# Altium PCB 主板-20190829.PcbDoc (part 3 of 6)
Units mm, origin at the board's own origin, x right, y up, seen from the top; angles counter-clockwise.
Board outline 97.69 x 103.45 mm, 2 copper layers (Top Layer, Bottom Layer); 77 components, 70 nets, 247 pads, 251 vias.
Unrouted connection lines stored in the file: 4.
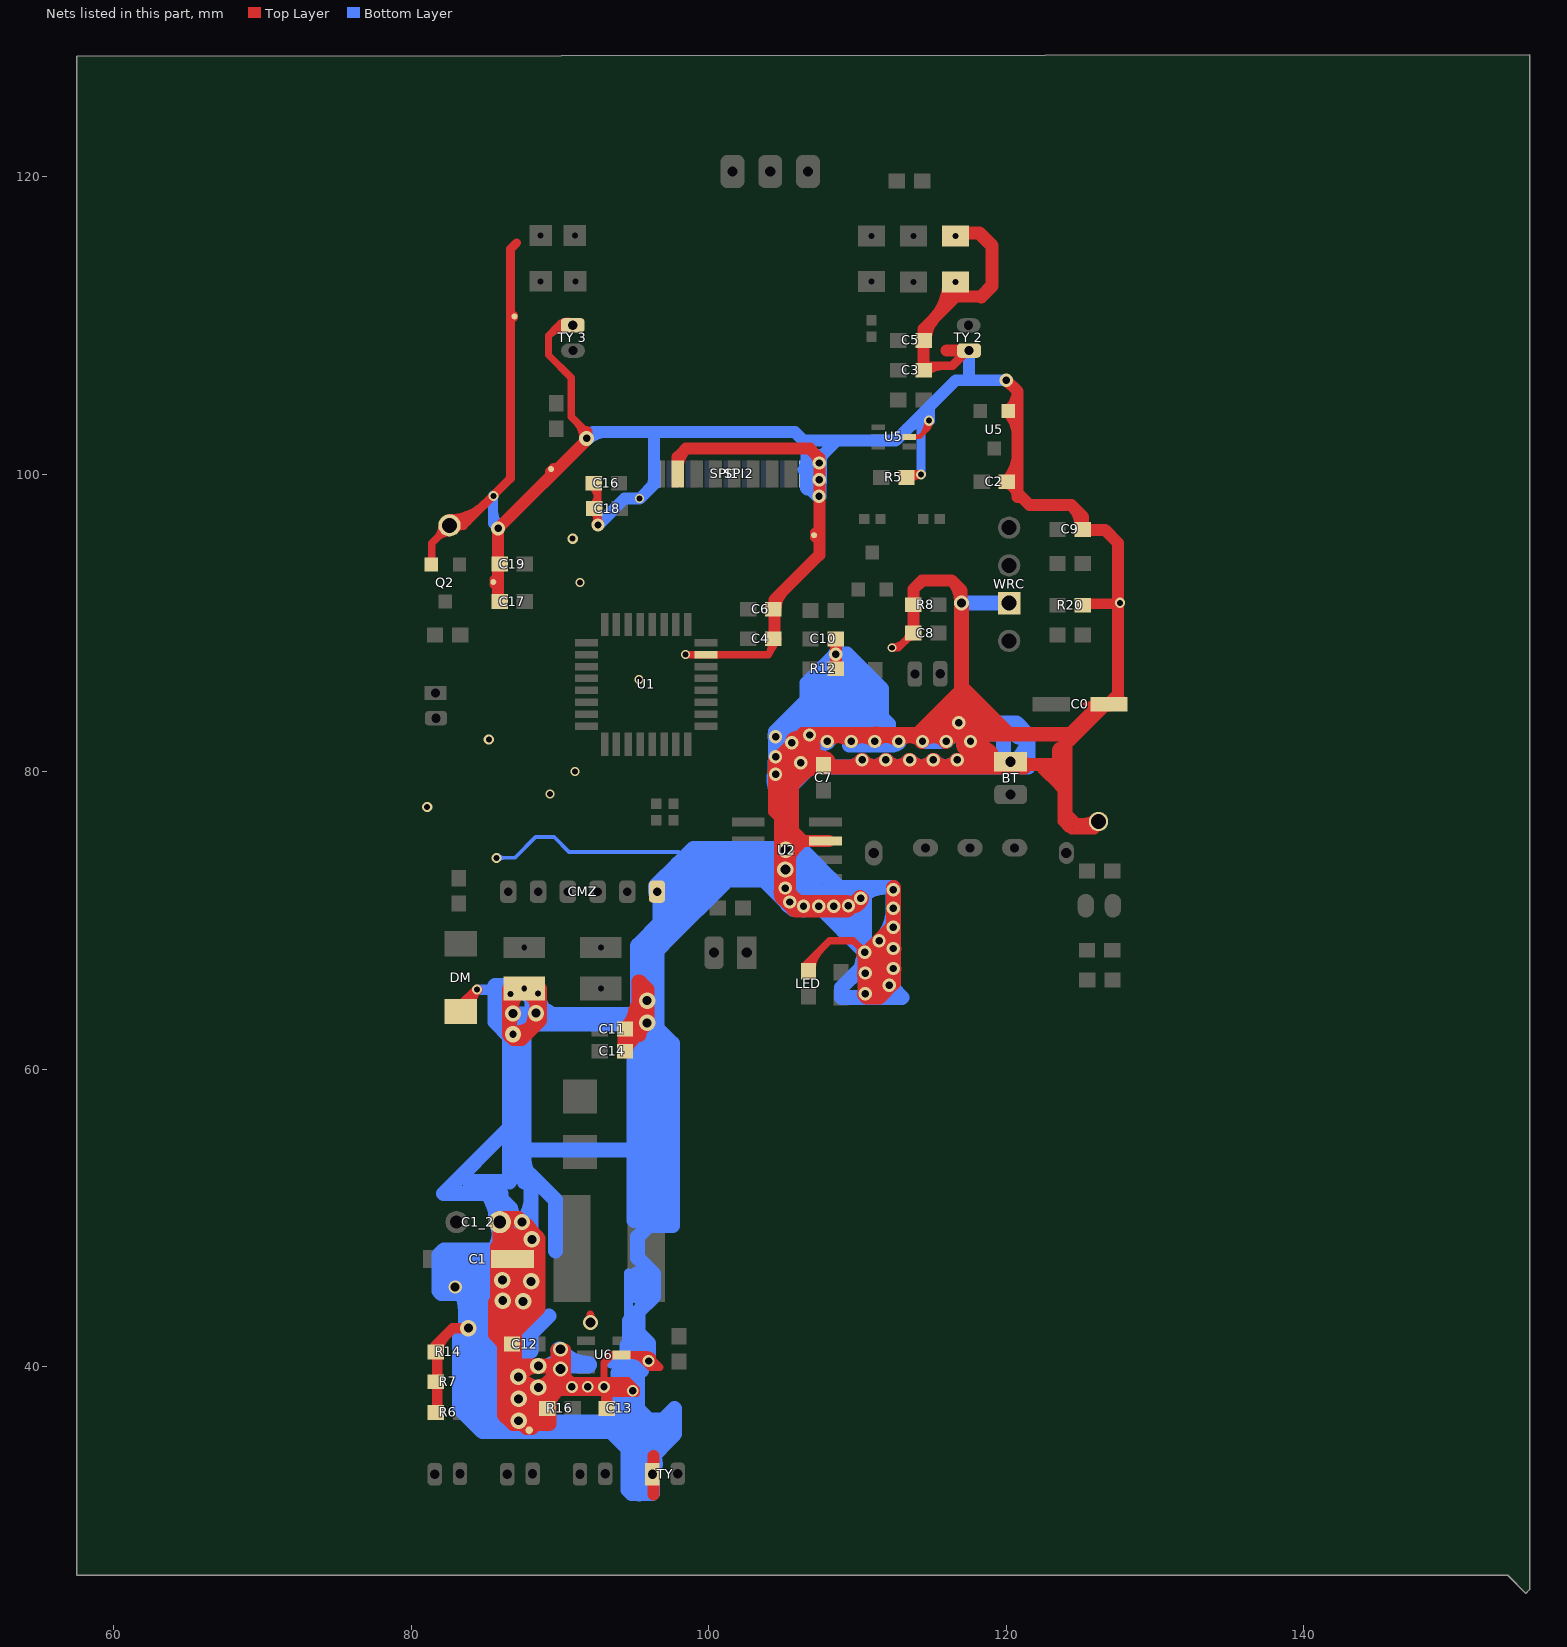
[diagram p3: the nets of this part, all layers, seen from the top]

## Via types
v1: diameter 0.9, hole 0.5, Top Layer to Bottom Layer, 107 vias
v2: diameter 0.68, hole 0.4, Top Layer to Bottom Layer, 87 vias
v3: diameter 1.1, hole 0.6, Top Layer to Bottom Layer, tented both sides, 17 vias
v4: diameter 0.6, hole 0.4, Top Layer to Bottom Layer, 7 vias
v5: diameter 0.8, hole 0.5, Top Layer to Bottom Layer, 5 vias
v6: diameter 0.7, hole 0.4, Top Layer to Bottom Layer, 5 vias
v7: diameter 1, hole 0.6, Top Layer to Bottom Layer, 4 vias
v8: diameter 1, hole 0.8, Top Layer to Bottom Layer, tented both sides, 4 vias
v9: diameter 1, hole 0.65, Top Layer to Bottom Layer, tented both sides, 4 vias
v10: diameter 1.2, hole 0.7, Top Layer to Bottom Layer, tented both sides, 2 vias
v11: diameter 1.1, hole 0.68, Top Layer to Bottom Layer, 2 vias
v12: diameter 0.8, hole 0.4, Top Layer to Bottom Layer, 2 vias
v13: diameter 0.9, hole 0.6, Top Layer to Bottom Layer, tented bottom, 1 vias
v14: diameter 0.95, hole 0.5, Top Layer to Bottom Layer, 1 vias
v15: diameter 0.9, hole 0.6, Top Layer to Bottom Layer, tented both sides, 1 vias
v16: diameter 1, hole 0.5, Top Layer to Bottom Layer, 1 vias
v17: diameter 1.1, hole 0.5, Top Layer to Bottom Layer, tented both sides, 1 vias

## Nets (pads, with @x,y where several pads share a name; then routed paths per layer and width w, separated by ;. In a path a pad name is that pad's centre, name@x,y a point inside that pad or via, vN(x,y) a via of type N, cw(c..) or ccw(c..) an arc to the next point about the centre after c; other vN are vias at no path point) (continued)
GND: "TY 2.2" "TY 3.2" BT.2 C0.2 C1.1 C1_2.1 C2.1 C3.1 C4.2 C5.1 C6.1 C7.1 C8.1 C9.1 C10.1 C11.2 C12.2 C13.2 C14.2 C16.1 C17.2 C18.1 C19.2 CMZ.2 DM.1 LED.1 pad.0@85.522,92.761 pad.0@86.944,110.617 pad.0@87.6,65.432 pad.0@87.935,35.738 pad.0@89.408,100.355 pad.0@96.33,100.032 pad.0@107.086,95.91 pad.0@116.6,112.932 pad.0@116.6,116.032 pad.4@82.575,96.571 pad.4@126.213,76.657 Q2.2 R5.1 R6.2 R7.1 R8.2 R12.1 R14.1 R16.2 R20.1 SPI1.7 SPI2.8 TY.2 U1.7 U2.3 U5.1@120.15,104.25 U5.2@113.495,102.514 U6.2 WRC.2 | length 2233.9
  Top Layer w0.254: C0.2@125.886,84.296 ccw(c125.298,83.763) 125.298,84.557 ; C0.2@125.897,84.807 cw(c125.298,85.397) 125.298,84.557 ; C0.2@126.913,84.546 126.695,84.557 125.298,84.557
  Top Layer w0.3: U5.2@113.495,102.514 114.198,102.514 ; v2@114.618,103.598 cw(c113.181,103.532) 114.198,102.514 ; v2@114.674,103.472 cw(c114.349,103.148) 114.808,103.148 cw(c115.267,103.148) v2@114.942,103.472 ; 114.679,102.995 ccw(c114.1,103.574) v2@114.918,103.612 ; v2(114.808,103.607) 114.808,103.124 114.198,102.514
  Top Layer w0.495: v4@98.45,87.877 U1.7@99.825,87.877 104.006,87.877 C4.2@104.523,88.724 ; C4.2@104.086,88.817 cw(c103.434,88.412) 104.089,88.013 ; C4.2@104.419,88.951 C4.2@104.65,88.951 ; C0.2@126.913,84.546 126.924,84.328 C0.2@126.924,84.633
  Top Layer w0.5: Q2.2@81.194,93.782 81.382,93.97 81.382,95.377 pad.4@82.575,96.571 ; Q2.2@81.209,94.116 ccw(c80.791,94.534) 81.382,94.534 ; pad.4@82.075,96.571 cw(c80.868,96.571) 81.722,95.717 cw(c82.575,94.864) pad.4@82.575,96.071 ; v9@89.866,39.676 cw(c89.439,39.249) 90.043,39.249 cw(c90.647,39.249) v9@90.22,39.676 ; v9@89.978,39.611 cw(c89.725,38.665) 90.573,39.155 ; 89.987,110.08 cw(c90.496,109.572) 90.559,110.288 ; 90.043,39.075 90.043,39.85 v9@90.348,39.545 ; v9@90.043,39.603 cw(c90.043,39.006) 90.465,39.428 ; v9@90.293,39.853 ccw(c90.904,39.853) 90.472,39.421 ; 90.36,110.167 cw(c89.826,110.616) 89.826,109.919 ; 90.515,109.79 ccw(c90.373,108.181) 89.23,109.323 ; v5@90.558,38.89 cw(c90.945,38.503) 90.945,39.051 ; v5@90.656,38.66 ccw(c89.587,38.784) v9@90.348,39.545 ; 90.855,109.919 89.826,109.919 ; v5@90.911,38.537 cw(c92.152,37.296) 92.152,39.051 ; 91.063,103.577 cw(c89.9,102.413) v16@91.546,102.413 ; v5@91.587,38.862 cw(c91.954,38.6) 91.954,39.051 ; 91.617,39.051 cw(c91.617,37.296) v5@92.858,38.537 ; v5@91.748,38.574 ccw(c90.842,37.951) 90.842,39.051 ; 91.792,39.051 cw(c91.792,38.604) v5@92.16,38.857 ; v16@91.796,102.845 90.754,103.886 90.754,104.008 90.769,104.023 90.769,106.487 89.23,108.026 89.23,109.323 ; v9@91.883,43.163 ccw(c91.55,43.536) 92.05,43.536 ; v5@91.994,38.572 cw(c92.924,37.908) 92.924,39.051 ; v9(92.05,42.977) 92.05,43.536 ; C16.1@92.14,99.223 cw(c91.125,98.208) 92.56,98.208 ; C18.1@92.19,97.877 ccw(c91.298,98.769) 92.56,98.769 ; C18.1@92.211,97.505 cw(c91.626,96.777) v1@92.56,96.777 ; v9@92.216,43.163 cw(c92.549,43.536) 92.05,43.536 ; v1@92.388,96.702 ccw(c91.895,97.011) 92.457,97.162 ; v1@92.416,96.738 ccw(c92.069,97.085) 92.56,97.085 ; v1(92.558,96.596) 92.558,96.795 92.56,96.797 C16.1@92.56,99.441 ; 92.56,97.073 ccw(c93.035,97.073) v1@92.699,96.738 ; v5@92.701,38.874 cw(c93.092,38.53) 93.092,39.051 ; v5@92.717,38.396 ccw(c93.179,38.858) 93.179,38.204 ; 92.824,39.051 cw(c92.824,38.503) v5@93.211,38.89 ; v5@93.07,38.749 ccw(c94.386,40.065) 94.386,38.204 ; v5@93.077,38.544 cw(c94.197,37.559) 94.197,39.051 ; 93.919,38.643 cw(c93.919,37.414) v5@94.788,38.283 ; 94.086,38.204 ccw(c94.086,39.198) v5@94.788,38.495 ; U6.2@94.539,40.767 95.25,40.767 ; 94.579,38.67 ccw(c94.894,38.986) v5@94.894,38.539 ; U6.2@94.59,40.804 cw(c94.59,39.015) v5@95.855,40.28 ; v5@94.74,38.227 95.123,38.227 95.123,38.494 94.566,39.051 ; v5@94.748,38.422 ccw(c94.086,38.571) 94.566,39.051 ; v5(94.894,38.389) v5@94.859,38.389 ; 95.797,40.804 cw(c95.797,40.222) v5@96.209,40.633 ; v5@95.941,40.535 cw(c95.829,41.346) 95.25,40.767 ; v5@95.971,40.236 cw(c96.036,39.267) 96.723,39.954 ; 104.242,78.736 cw(c105.592,78.736) v1@104.637,79.691 ; v1@104.242,79.93 cw(c105.592,79.93) v1@104.637,80.885 ; v1@104.315,80.94 cw(c103.978,80.781) 104.242,80.518 ; 104.369,80.366 104.572,80.366 v1@106.731,82.525 ; v1@104.47,80.727 ccw(c104.524,81.358) 105.072,81.041 ; v1@104.496,80.726 ccw(c104.496,81.78) 105.241,81.035 ; v1@104.574,80.016 cw(c104.787,80.518) 104.242,80.518 ; 104.603,71.917 cw(c105.345,71.772) v1@105.032,72.46 ; 104.626,72.034 cw(c105.177,71.926) v1@105.132,72.486 ; 104.648,72.147 cw(c105.772,72.147) v11@105.286,73.161 ; 104.648,72.252 104.648,76.86 104.242,77.267 104.242,80.518 ; 104.648,72.689 ccw(c105.658,72.689) v1@104.944,71.975 ; 104.648,72.74 cw(c107.193,72.74) v11@105.394,74.54 ; 104.648,72.942 cw(c105.391,72.942) v11@105.069,73.612 ; 104.648,73.896 ccw(c106.865,73.896) v1@105.297,72.328 ; 104.648,73.947 cw(c105.986,73.947) v11@105.04,74.894 ; 104.648,74.175 ccw(c105.9,74.175) v11@105.015,73.29 ; 104.648,75.382 ccw(c107.107,75.382) v11@105.368,73.644 ; 104.648,75.557 ccw(c105.986,75.557) v11@105.04,74.611 ; 104.648,76.764 ccw(c107.193,76.764) v11@105.394,74.964 ; 104.662,75.279 ccw(c105.689,75.417) v11@105.06,74.593 ; v1@104.696,79.832 cw(c106.282,79.832) 105.16,80.954 ; v1@104.696,81.026 cw(c105.178,81.026) 104.837,81.367 cw(c104.496,81.709) v1@104.496,81.226 ; 104.833,80.627 ccw(c103.495,81.966) 105.388,81.966 cw(c104.66,81.966) 105.175,81.451 ; 104.986,81.517 cw(c105.588,80.915) v1@105.588,81.766 ; 105.009,81.54 cw(c106.782,79.767) v1@106.782,82.274 ; v11@105.255,73.839 cw(c105.721,74.11) v11@105.374,74.523 ; 105.271,81.547 cw(c104.496,82.322) v1@104.496,81.226 ; v1@105.443,81.719 cw(c106.782,80.381) v1@106.782,82.274 ; v1@105.541,81.669 ccw(c105.631,82.237) 106.037,81.831 ; v1@105.588,82.166 ccw(c105.588,82.894) 106.103,82.379 ; v1@105.619,82.163 ccw(c105.82,83.435) v1@106.731,82.525 ; 105.687,81.481 ccw(c105.202,81.966) v1@105.888,81.966 ; v1@105.788,81.966 cw(c106.639,81.966) 106.037,82.567 ; 105.863,82.393 cw(c106.782,81.474) 106.782,82.774 ccw(c106.782,82.088) 106.296,82.573 ; 106.094,81.888 cw(c104.496,83.487) v1@104.496,81.226 ; 106.188,82.211 cw(c106.542,81.599) v1@106.729,82.281 ; 106.267,82.061 cw(c106.782,81.546) v1@106.782,82.274 ; LED.1@106.45,66.65 cw(c107.182,66.65) 106.664,67.167 ; LED.1@106.45,66.75 106.45,66.953 108.153,68.656 109.703,68.656 v1(110.49,67.869) ; v1@106.582,82.463 ccw(c106.248,82.444) 106.248,82.779 ; v1@106.628,82.346 ccw(c106.248,82.032) 106.248,82.525 ; v1@106.889,82.305 cw(c107.172,81.861) 107.308,82.37 ; v1@106.906,82.317 cw(c107.168,81.989) 107.277,82.394 ; LED.1@106.95,66.65 cw(c108.889,66.65) 107.518,68.021 ; 107.387,82.525 ccw(c107.387,81.868) v1@106.923,82.332 ; 107.418,82.537 ccw(c107.418,81.838) v1@106.923,82.332 ; 107.629,82.537 cw(c107.629,81.833) v1@108.232,82.197 ; 107.642,82.525 cw(c107.642,81.83) v1@108.228,82.203 ; v1@107.751,82.242 cw(c108.246,81.801) 108.566,82.38 ; v1@107.752,82.243 cw(c108.237,81.806) 108.547,82.38 ; v1@107.804,81.939 ccw(c106.744,81.299) v1@106.744,82.537 ; v1@107.807,81.935 ccw(c106.731,81.249) v1@106.731,82.525 ; 107.897,82.537 cw(c107.897,80.363) 109.434,81.901 ccw(c107.927,80.394) 107.927,82.525 ; 108,82.779 ccw(c108,81.255) v1@106.923,82.332 ; 108.416,82.525 ccw(c108.416,81.601) 107.763,82.254 cw(c108.447,81.571) 108.447,82.537 ; 109.104,82.537 cw(c109.104,81.571) 109.787,82.254 ccw(c109.134,81.601) 109.134,82.525 ; 109.106,82.078 ccw(c108.723,81.369) 108.124,81.908 cw(c108.725,81.374) 109.114,82.077 ; v1@109.351,82.242 cw(c109.846,81.801) 110.166,82.38 ; v1@109.352,82.243 cw(c109.837,81.806) 110.147,82.38 ; 109.497,82.537 cw(c109.497,80.363) 111.034,81.901 ccw(c109.527,80.394) 109.527,82.525 ; 109.623,82.525 ccw(c109.623,80.394) 108.117,81.901 cw(c109.654,80.363) 109.654,82.537 ; 110.016,82.525 ccw(c110.016,81.601) 109.363,82.254 cw(c110.046,81.572) 110.046,82.537 ; v1@110.29,67.869 ccw(c109.807,67.869) 110.149,68.21 ccw(c110.49,68.552) v1@110.49,68.069 ; 110.704,82.537 cw(c110.704,81.571) 111.387,82.254 ccw(c110.734,81.601) 110.734,82.525 ; 110.706,82.078 ccw(c110.323,81.369) 109.724,81.908 cw(c110.325,81.374) 110.714,82.077 ; v1@110.947,82.237 cw(c111.457,81.801) 111.789,82.384 ; 111.223,82.525 ccw(c111.223,80.394) 109.717,81.901 cw(c111.252,80.368) 111.252,82.537 ; v1@111.327,81.912 cw(c111.926,81.399) 112.316,82.085 ; 111.616,82.525 ccw(c111.616,81.601) 110.963,82.254 cw(c111.647,81.571) 111.647,82.537 ; v4(112.319,88.341) 112.759,88.341 C8.1@113.75,89.332 ; v4@112.319,88.391 ccw(c112.319,89.576) 113.156,88.738 ; 112.347,82.537 cw(c112.347,81.671) v1@113.002,82.239 ; 112.364,82.525 cw(c112.364,81.671) v1@112.998,82.243 ; v1@112.527,82.21 cw(c113.143,81.794) 113.143,82.537 ; v1@112.551,82.242 cw(c113.046,81.801) 113.366,82.38 ; v1@112.552,82.243 cw(c113.037,81.806) 113.347,82.38 ; v1@112.563,82.254 cw(c113.216,81.601) 113.216,82.525 ; v1@112.624,81.911 ccw(c111.252,80.721) 111.252,82.537 ; v1@112.627,81.908 ccw(c111.239,80.656) 111.239,82.525 ; 112.697,82.537 cw(c112.697,80.363) 114.234,81.901 ccw(c112.727,80.394) 112.727,82.525 ; 112.823,82.525 ccw(c112.823,80.394) 111.317,81.901 cw(c112.854,80.363) 112.854,82.537 ; v1@112.917,81.901 cw(c114.423,80.394) 114.423,82.525 ; v1@112.924,81.908 cw(c113.523,81.369) 113.906,82.078 ; v1@112.924,81.909 cw(c113.525,81.374) 113.914,82.077 ; v1@112.941,81.93 cw(c114.084,81.158) 114.084,82.537 ; 113.238,88.82 ccw(c112.726,89.332) C8.1@113.45,89.332 ; C8.1@113.359,88.94 cw(c113.7,88.599) C8.1@113.7,89.082 ; 113.904,82.537 cw(c113.904,81.571) 114.587,82.254 ccw(c113.934,81.601) 113.934,82.525 ; v1@114.151,82.242 cw(c114.646,81.801) 114.966,82.38 ; v1@114.152,82.243 cw(c114.637,81.806) 114.947,82.38 ; v1@114.162,82.253 cw(c114.843,81.58) 114.843,82.537 ; v1@114.163,82.254 cw(c114.816,81.601) 114.816,82.525 ; 114.297,82.537 cw(c114.297,80.363) 115.834,81.901 ccw(c114.327,80.394) 114.327,82.525 ; v1@114.524,81.908 cw(c115.123,81.369) 115.506,82.078 ; v1@114.524,81.909 cw(c115.125,81.374) 115.514,82.077 ; 115.504,82.537 cw(c115.504,81.571) 116.187,82.254 ccw(c115.534,81.601) 115.534,82.525 ; v1@115.896,82.226 ccw(c115.685,82.715) 116.218,82.715 ; v1@115.953,82.241 ccw(c115.919,82.537) 116.218,82.537 ; 116.023,82.525 ccw(c116.023,80.394) 114.517,81.901 cw(c116.04,80.397) 116.04,82.537 ; v1@116.15,82.139 cw(c116.434,82.295) 116.205,82.525 ; v1@116.153,82.133 cw(c116.464,82.291) 116.218,82.537 ; 116.416,82.525 ccw(c116.416,81.601) 115.763,82.254 cw(c116.447,81.571) 116.447,82.537 ; 116.459,82.779 117.831,82.779 cw(c117.831,83.649) v1@117.004,83.375 ; v1@116.53,83.218 ccw(c117.138,83.419) 117.138,82.779 ; 117.213,82.537 cw(c117.213,81.753) v1@117.843,82.221 ; 117.228,82.525 cw(c117.228,81.751) v1@117.839,82.226 ; v1@117.442,81.923 ccw(c116.218,81.012) 116.218,82.537 ; v1@117.444,81.919 ccw(c116.205,80.954) 116.205,82.525 ; 117.623,82.525 ccw(c117.623,80.394) 116.117,81.901 cw(c117.654,80.363) 117.654,82.537 ; 118.059,82.525 116.205,82.525 ; 118.059,82.537 116.218,82.537 ; BT.2@120.674,80.605 ccw(c121.347,81.239) BT.2@121.347,80.315 ; BT.2@121.03,80.391 cw(c121.727,79.694) 121.727,80.68 ; BT.2@121.03,80.957 ccw(c121.698,81.625) 121.698,80.68 ; BT.2@121.038,80.948 ccw(c122.504,82.328) 122.504,80.315 ; 123.977,76.657 123.977,77.876 ; 124.206,77.216 124.968,76.454 ; 124.206,77.648 123.977,77.876 ; 124.206,81.839 124.206,76.886 ; 124.231,82.525 124.117,82.639 ; 124.612,76.81 124.485,76.81 ; 124.765,76.657 126.263,76.657 126.263,76.352 125.959,76.048 124.384,76.048 ; 125.12,83.033 124.003,81.915 124.003,82.525 ; 125.29,76.048 ccw(c125.29,77.238) pad.4@126.297,76.604 ; 125.499,84.021 cw(c126.163,83.357) C0.2@126.163,84.296 ; pad.4@125.82,76.736 cw(c125.476,76.805) 125.476,76.454 ; pad.4@125.874,76.87 cw(c124.384,77.809) 124.384,76.048 ; pad.4@125.884,76.886 cw(c124.816,77.628) 124.816,76.327 ; pad.4@125.899,76.905 cw(c124.968,77.639) 124.968,76.454 ; pad.4@125.93,76.374 ccw(c125.247,75.692) 125.247,76.657 ccw(c125.247,77.623) pad.4@125.93,76.94 ; C0.2@126.924,84.633 C0.2@126.913,84.622 ; 89.23,109.323 89.826,109.919 ; v9@90.348,39.545 90.842,39.051 ; 90.842,39.051 92.924,39.051 ; 92.924,39.051 92.964,39.091 ; v5(92.964,38.643) 92.95,38.643 93.15,38.443 93.389,38.204 94.674,38.204 v5@94.859,38.389 ; v5(92.964,38.643) v5@94.605,38.643 ; v5(92.964,38.643) 92.964,39.091 ; 92.964,39.091 93.004,39.051 94.197,39.051 ; 92.964,39.091 92.964,40.272 93.496,40.804 95.873,40.804 96.723,39.954 ; 94.197,39.051 94.566,39.051 ; 94.197,39.051 v5@94.605,38.643 ; v5@94.605,38.643 v5@94.859,38.389 ; 95.25,40.767 96.063,39.954 96.723,39.954 ; 104.242,80.518 106.248,82.525 ; 104.242,80.518 104.242,80.772 v1(104.496,81.026) 106.248,82.779 ; 106.248,82.525 v1@106.731,82.525 ; 106.248,82.779 114.325,82.779 115.265,82.779 116.218,82.779 116.218,82.715 ; v1@106.731,82.525 111.239,82.525 ; v1@106.731,82.525 v1@106.743,82.537 ; v1@106.743,82.537 111.252,82.537 ; 111.239,82.525 116.027,82.525 116.205,82.525 ; 111.252,82.537 114.084,82.537 ; 114.084,82.537 116.04,82.537 ; 116.04,82.537 116.218,82.537 ; 116.205,82.525 116.218,82.537 ; 116.218,82.537 116.218,82.715 ; 122.504,80.315 123.52,80.315 123.685,80.48 ; 122.504,80.315 121.218,80.315 120.853,80.68 123.485,80.68 123.685,80.48 ; 123.685,80.48 123.698,80.493 123.698,80.467 ; 123.685,80.48 123.698,80.467 ; 123.698,76.733 123.698,78.156 ; 123.698,76.733 123.698,76.632 124.155,76.175 124.206,76.225 ; 123.698,76.733 124.206,76.225 ; 123.698,78.156 123.698,79.121 123.698,80.467 ; 123.698,78.156 123.977,77.876 ; 123.698,80.467 123.977,80.188 123.977,77.876 ; 124.003,82.525 124.117,82.639 ; 124.003,82.525 124.003,82.753 124.117,82.639 ; 124.117,82.639 126.024,84.546 C0.2@126.837,84.546 ; 124.206,76.225 124.384,76.048 ; 124.206,76.225 124.206,76.886 ; 124.206,76.886 124.282,76.81 124.485,76.81 ; 124.485,76.81 124.485,76.657 124.816,76.327 ; 124.816,76.327 125.603,76.327 125.476,76.454 ; 124.968,76.454 125.476,76.454 ; C0.2@126.837,84.546 C0.2@126.913,84.546 C0.2@126.913,84.622 ; C0.2@126.837,84.546 C0.2@126.913,84.622 ; 104.242,80.458 cw(c104.624,80.458) 104.54,80.831 ccw(c104.624,80.458) 104.242,80.458
  Top Layer w0.6: pad.4@82.271,96.52 pad.4@83.16,96.52 ; pad.4@82.575,96.421 ccw(c82.575,98.328) 83.924,96.979 ; pad.4@82.575,96.571 83.515,96.571 ; pad.4@82.575,97.021 ccw(c82.575,100.376) 84.948,98.004 ; pad.4@82.926,96.289 cw(c83.515,95.815) 83.515,96.571 ; pad.4@82.926,96.853 ccw(c83.515,97.327) 83.515,96.571 ; 86.665,110.184 cw(c87.377,110.184) pad.0@86.873,110.688 ; 86.665,111.05 ccw(c87.377,111.05) pad.0@86.873,110.546 ; 87.097,115.57 86.665,115.138 86.665,99.72 83.515,96.571 ; R5.1@113.296,99.797 113.499,100 v2(114.275,100) ccw(c114.275,98.929) R5.1@113.492,99.66 ; C3.1@114.45,107.3 116.382,107.3 117.413,108.331 117.501,108.419 ; C3.1@114.641,106.859 cw(c115.707,105.793) 115.707,107.3 ; 116.718,107.636 ccw(c116.036,108.319) 117.001,108.319
  Top Layer w0.7: R14.1@81.65,41 81.65,41.442 82.804,42.596 v3(83.845,42.596) ; R6.2@81.737,36.932 R14.1@81.737,41.025 ; R14.1@81.85,41 cw(c83.4,41) 82.304,42.096 ; DM.1@83.34,63.885 83.34,64.265 v2(84.43,65.354) ccw(c85.407,64.377) DM.1@84.073,64.015 ; R20.1@125.15,91.308 v2@127.432,91.308 ; R20.1@125.306,91.094 cw(c125.822,90.578) 125.822,91.308
  Top Layer w0.8: 85.663,92.619 ccw(c85.219,93.064) 85.847,93.064 ; 85.663,92.902 cw(c85.219,92.458) 85.847,92.458 ; C17.2@85.847,91.465 v14(85.847,96.363) 91.796,102.311 v16@91.796,102.845 ; pad.0@86.614,65.406 87.617,65.406 87.617,65.431 pad.0@87.617,65.457 ; pad.0@86.629,65.11 cw(c87.343,64.397) pad.0@87.343,65.406 ; v3@87.321,39.412 ccw(c88.91,40.667) v3@88.91,38.643 ; v3@87.352,37.768 cw(c88.91,36.819) v3@88.91,38.643 ; v3@87.374,37.846 cw(c88.472,37.846) 87.695,38.622 ; v3@87.374,37.849 cw(c88.423,37.866) 87.681,38.608 87.716,38.643 v3@88.91,38.643 ; R16.2@89.15,37.639 89.281,37.77 89.954,38.443 93.15,38.443 C13.2@93.15,37.2 ; R16.2@89.3,37.2 cw(c90.722,37.2) 89.716,38.205 ; 89.408,100.155 ccw(c89.408,100.715) 89.804,100.319 ; 89.444,99.96 ccw(c89.048,100.355) 89.608,100.355 ; 89.764,40.338 cw(c90.773,40.338) v9@90.109,41.098 ; v9@89.764,40.769 ccw(c90.959,40.769) v9@90.114,39.923 ; v9@89.764,41.148 89.764,40.386 ; v9@89.944,39.865 ccw(c89.318,39.94) 89.764,40.386 ; v9@89.972,39.923 ccw(c89.066,40.83) v9@90.348,40.83 ; v9@89.972,41.103 cw(c89.066,40.196) v9@90.348,40.196 ; v9@89.983,39.773 cw(c89.431,39.041) 90.348,39.041 ; v9@89.993,39.766 cw(c89.506,38.922) 90.447,39.174 ; v9@90.043,39.85 v9(90.043,39.853) v9@90.297,39.853 ; v9(90.043,41.173) 90.348,41.173 90.348,39.853 v9@90.297,39.853 ; v9@90.076,39.947 cw(c90.228,40.386) 89.764,40.386 ; v9@90.13,41.123 ccw(c91.041,40.597) v9@90.297,39.853 ; v9@90.14,39.83 ccw(c90.899,39.651) 90.348,39.1 ; v9@90.143,39.853 ccw(c91.465,39.853) v5@90.53,38.918 ; 90.322,38.443 ccw(c90.322,39.126) v5(90.805,38.643) ; 91.288,38.443 cw(c91.288,39.126) v5(90.805,38.643) ; 91.351,38.443 ccw(c91.351,39.18) v5(91.872,38.659) ccw(c92.393,39.18) 92.393,38.443 ; 92.481,38.443 ccw(c92.481,39.126) v5(92.964,38.643) cw(c92.515,38.194) 93.15,38.194 ; v5@92.95,38.673 92.95,38.643 v5(90.805,38.643) ; 96.284,31.4 96.284,34.006 ; SPI1.7@97.917,100.032 97.917,101.16 98.484,101.727 106.807,101.727 107.442,101.092 v1(107.442,100.762) v1(107.442,99.644) 107.442,94.59 104.419,91.567 C4.2@104.419,88.951 ; SPI1.7@97.942,100.507 cw(c99.58,100.507) 98.422,101.665 ; C6.1@104.5,90.932 cw(c106.228,90.932) 105.006,92.154 ; v11@105.05,73.537 ccw(c104.403,74.185) 105.318,74.185 ; v11@105.075,74.646 cw(c104.489,74.06) 105.318,74.06 ; v1@105.156,72.104 ccw(c106.317,72.104) v1@105.496,71.282 ; 105.156,76.86 v11@105.156,73.575 ; v11@105.181,72.923 105.181,73.304 v11@105.156,73.33 ; v11@105.186,74.902 ccw(c105.238,76.473) 106.35,75.362 ; v11@105.251,74.885 ccw(c105.533,75.42) 106.017,75.056 ; v11@105.273,73.525 cw(c105.746,73.902) v11@105.318,74.33 ; v11@105.306,73.431 cw(c107.446,73.431) 105.933,74.945 ; v1@105.473,71.295 cw(c105.578,71.704) 105.156,71.704 v1@105.156,71.933 ; 105.588,76.124 106.35,75.362 ; 106.07,75.362 U2.3@108.077,75.362 ; 107.123,101.411 cw(c106.474,100.762) v1@107.392,100.762 ; pad.0@107.228,95.769 ccw(c106.711,96.286) 107.442,96.286 ; pad.0@107.228,96.052 cw(c106.711,95.535) 107.442,95.535 ; R12.1@108.55,86.932 v1(108.55,87.909) C10.1@108.55,88.932 ; C8.1@113.767,89.813 113.767,92.278 114.351,92.862 116.332,92.862 ; C3.1@114.45,107.3 114.45,109.776 116.6,111.926 pad.0@116.6,112.932 ; C5.1@114.6,109 cw(c116.836,109) 115.255,110.581 ; 115.036,110.362 ccw(c112.466,112.932) pad.0@116.1,112.932 ; 116.002,108.331 117.413,108.331 117.475,108.331 ; pad.0@116.388,112.72 cw(c115.876,112.208) 116.6,112.208 cw(c117.324,112.208) pad.0@116.812,112.72 ; 116.401,111.728 ccw(c115.197,112.932) pad.0@116.9,112.932 ; 116.756,111.946 118.321,111.946 ; v7@116.9,91.351 ccw(c114.95,91.48) 116.332,92.862 ; v7(117,91.345) 117,92.194 116.332,92.862 ; v1(120.015,106.324) 120.766,105.573 ; C2.1@120.029,99.571 ccw(c118.25,101.35) 120.766,101.35 ; C2.1@120.073,99.404 cw(c119.817,98.489) 120.766,98.489 ; U5.1@120.115,104.19 cw(c118.541,102.616) 120.766,102.616 ; U5.1@120.121,104.316 ccw(c119.219,105.573) 120.766,105.573 ; C2.1@120.595,99.005 ccw(c120.181,99.419) 120.766,99.419 ; C9.1@125,96.307 ccw(c122.885,96.443) 124.384,97.942 ; C0.2@126.924,84.633 127.533,85.242 127.533,95.377 126.644,96.266 125.184,96.266 125.184,97.142 124.384,97.942 ; v3@88.91,38.643 v5(90.805,38.643) ; 89.764,40.386 v9@90.297,39.853 ; v9@90.297,39.853 90.348,39.802 v9@90.348,39.545 ; 90.348,39.1 v9@90.348,39.545 ; 90.348,39.1 v5(90.805,38.643) ; v9@90.348,39.545 ccw(c91.466,39.545) v5(90.805,38.643) ; v1@105.156,71.933 ccw(c105.946,71.933) 105.49,71.288 cw(c105.946,71.933) v1@105.156,71.933 ; v1@105.156,71.933 v11@105.156,73.33 ; v11@105.156,73.33 v11@105.156,73.575 ; v11@105.156,73.33 105.131,73.483 105.115,73.575 105.131,73.575 v11@105.156,73.575 ; v11@105.156,73.575 105.318,73.575 v11@105.318,74.33 ; v11@105.318,74.33 106.35,75.362 ; 118.165,111.946 ccw(c118.165,112.467) 118.533,112.099 ; 118.165,111.946 ccw(c118.165,112.467) 118.533,112.099 ; 118.165,111.946 ccw(c118.165,112.467) 118.533,112.099 ; 120.766,105.573 120.766,98.74 121.564,97.942 124.384,97.942 ; 127.533,85.1 ccw(c128.217,85.1) 127.734,84.617 cw(c128.217,85.1) 127.533,85.1
  Top Layer w0.9: pad.0@116.865,116.23 118.199,116.23 119.05,115.38 119.05,112.674 118.321,111.946
  Top Layer w1: 85.674,43.164 cw(c87.443,43.164) v3@86.192,44.415 ; 85.811,44.928 cw(c87.025,44.928) v3@86.167,45.786 ; v3@85.811,45.405 ccw(c87.111,45.405) v3@86.192,44.485 ; C1.1@85.811,46.715 ccw(c87.025,46.715) v3@86.167,45.857 ; C1_2.1@85.928,49.987 87.198,49.987 v3(87.452,49.733) 88.036,49.149 88.036,49.124 ; C1_2.1@85.95,49.727 C1_2.1@85.95,49.643 ; 86.012,41.827 ccw(c86.73,42.545) C12.2@86.73,41.529 ; C1.1@86.043,47.273 cw(c87.117,47.71) 86.297,48.531 85.95,48.184 ; v3@86.103,45.863 ccw(c84.869,47.625) C1.1@87.02,47.625 ; v3@86.112,45.775 cw(c85.545,44.413) v3@87.02,44.413 ; v3@86.121,44.485 ccw(c83.951,46.656) C1.1@87.02,46.656 ; C1_2.1@86.127,49.55 cw(c87.181,48.496) v3@87.181,49.987 ; v3(86.131,45.822) v3@86.131,44.45 ; v3@86.157,44.5 ccw(c86.16,46.023) 87.237,44.946 ; v3@86.169,44.498 ccw(c86.393,45.356) 87.02,44.729 ; C1_2.1@86.2,49.725 ccw(c88.248,49.708) 86.8,48.26 ; v3@86.207,44.449 ccw(c87.077,44.432) 86.462,43.816 ; 86.233,42.729 ccw(c87.93,42.729) C12.2@86.73,41.529 ; 86.276,36.958 cw(c89.565,36.958) v3@87.239,39.284 ; 86.276,38.782 ccw(c89.632,38.782) 87.259,36.408 ccw(c87.774,36.923) 87.774,36.195 ; 86.276,40.255 ccw(c89.632,40.255) v3@87.259,37.881 ; 86.276,40.432 cw(c87.827,40.432) C12.2@86.73,41.529 ; 86.309,40.513 cw(c87.746,40.513) C12.2@86.73,41.529 ; 86.614,63.03 ccw(c87.515,63.03) v17@86.878,62.392 ; 86.614,63.081 cw(c87.515,63.081) v3@86.878,63.719 ; v3@86.614,63.776 cw(c88.656,63.776) pad.0@87.212,65.22 ; 86.614,64.427 ccw(c87.515,64.427) v3@86.878,63.789 ; pad.0@86.614,65.406 86.614,62.332 86.868,62.078 87.427,62.078 ; pad.0@86.682,64.926 ccw(c86.593,65.712) pad.0@87.211,65.219 ; 86.718,49.987 cw(c86.718,48.999) v3@87.417,49.698 ; 86.722,45.525 ccw(c88.445,45.987) v3@87.553,44.443 ; C1.1@86.729,47.165 cw(c86.026,46.462) 87.02,46.462 ; 86.786,64.418 ccw(c87.557,64.211) v3@86.885,63.781 ; pad.0@86.796,65.147 cw(c86.186,64.81) 86.856,64.617 ; v17@86.843,62.407 ccw(c86.843,64.613) 88.402,63.053 ; v17@86.885,62.383 ccw(c87.427,62.71) 87.427,62.078 ; 86.944,38.738 cw(c87.594,38.738) v3@87.232,39.278 ; 86.944,40.067 ccw(c87.951,40.067) v3@87.239,39.355 ; 86.944,42.868 cw(c89.059,42.868) 87.564,44.364 ccw(c88.352,43.575) 87.237,43.575 ; 86.944,43.459 cw(c87.908,43.459) v3@87.547,44.353 ; 86.979,48.615 cw(c85.599,47.235) C1.1@87.55,47.235 ; v3@87.02,44.291 cw(c88.486,44.291) v3@88.076,45.697 ; 87.02,45.746 ccw(c88.876,45.746) v3@87.564,44.435 ; v3@87.174,37.841 cw(c85.372,37.666) 86.652,36.386 ; v3@87.176,37.861 ccw(c86.283,38.138) 86.944,38.799 ; v3@87.184,37.876 ccw(c86.742,38.215) 87.136,38.608 ; v3@87.219,36.423 cw(c87.107,37.593) 86.276,36.762 ; v3@87.224,37.896 ccw(c87.224,40.163) v3@88.827,38.56 ; v3@87.236,39.357 cw(c89.007,41.437) C12.2@86.276,41.437 ; 87.237,40.056 v3(88.55,40.056) ; v3@87.247,39.345 ccw(c88.55,40.129) v3(88.55,38.608) ; v3@87.247,39.295 cw(c88.55,38.561) v3(88.55,40.056) ; v3@87.266,36.347 cw(c88.42,35.645) 88.101,36.957 ; v3@87.268,37.823 cw(c88.55,37.169) v3(88.55,38.608) ; v3@87.274,36.373 cw(c88.805,36.373) 87.722,37.455 ; v3@87.423,49.693 cw(c86.56,48.495) v3@88.036,48.495 ; v3@87.435,36.195 cw(c87.435,35.238) 88.112,35.915 ; v3@87.439,49.685 cw(c87.231,48.907) v3@88.036,48.907 ; v3@87.485,44.375 cw(c86.202,43.67) 87.237,42.635 ; v3@87.493,44.435 ccw(c84.976,46.952) 88.536,46.952 ; v3@87.503,44.276 cw(c89.532,44.276) 88.097,45.71 ccw(c89.104,44.703) v3@87.68,44.703 ; C1.1@87.503,46.639 cw(c88.246,46.639) C1.1@87.721,47.165 ; C1.1@87.503,46.972 cw(c89.705,46.972) v3@88.148,48.529 ; C1.1@87.503,47.215 ccw(c89.532,47.215) v3@88.097,45.781 ; v3@87.57,44.428 cw(c88.174,44.845) 87.655,45.364 87.503,45.212 ; C1.1@87.569,47.294 ccw(c87.066,47.653) 87.503,48.09 ; v3@87.571,44.426 cw(c88.218,44.826) v3@87.68,45.364 ; v3@87.578,44.404 cw(c89.247,44.56) v3(88.062,45.745) v3@87.68,45.364 ; C1.1@87.579,47.165 cw(c85.27,44.856) 88.536,44.856 ; pad.0@87.612,65.41 87.617,65.406 pad.0@87.72,65.302 ; C1.1@87.617,47.33 ccw(c87.164,48.624) v3@88.536,48.624 ; v3@87.668,49.517 cw(c86.715,48.565) v3@88.063,48.565 ; C1.1@87.743,47.271 cw(c88.948,47.73) v3@88.036,48.641 ; pad.0@87.747,65.281 ccw(c88.531,66.045) pad.0@88.517,64.95 ; pad.0@87.756,65.266 ccw(c88.519,66.029) pad.0@88.519,64.95 ; 87.758,35.915 cw(c88.435,35.238) 88.435,36.195 ; 87.786,62.437 ccw(c86.443,63.779) v3@88.342,63.779 ; C1.1@87.889,46.639 cw(c86.887,46.048) v3@88.013,45.758 ; pad.0@87.952,65.07 ccw(c88.34,65.447) pad.0@88.588,64.967 ; pad.0@87.979,65.231 ccw(c88.579,65.726) pad.0@88.505,64.951 ; pad.0@87.988,65.22 cw(c86.399,63.631) v3@88.646,63.631 ; v3@88.026,45.71 cw(c86.797,44.481) 88.536,44.481 ; v3@88.026,45.781 ccw(c86.797,47.01) 88.536,47.01 ; v3@88.032,45.705 cw(c87.251,44.668) 88.536,44.85 ; v3@88.077,48.529 cw(c86.971,47.423) 88.536,47.423 ; v3@88.087,45.789 cw(c89.134,47.625) C1.1@87.02,47.625 ; v3@88.089,48.609 cw(c87.568,49.561) 86.8,48.793 ; v3@88.12,48.614 cw(c88.223,49.327) 87.503,49.327 87.503,48.108 ; pad.0@88.146,65.418 cw(c88.128,64.729) pad.0@88.628,65.204 ; 88.235,37.969 ccw(c87.596,38.608) v3@88.5,38.608 ; pad.0@88.336,64.647 cw(c88.994,64.847) pad.0@88.387,65.171 ; v3@88.349,63.806 ccw(c87.695,64.209) 88.438,64.408 ; v3@88.357,63.815 ccw(c87.658,64.513) 88.646,64.513 ; v3@88.533,38.561 cw(c88.149,37.496) R16.2@89.281,37.496 ; v3@88.55,38.658 ccw(c88.55,39.562) 89.189,38.923 ; pad.0@88.589,64.968 cw(c88.339,65.441) pad.0@87.96,65.062 ; pad.0@88.623,65.208 ccw(c88.125,64.69) pad.0@87.617,65.199 ; R16.2@89.1,37.2 ccw(c88.689,34.348) 86.652,36.386 ; 89.306,38.608 89.281,38.608 ; 89.552,40.056 cw(c89.552,39.362) v9(90.043,39.853) ; C11.2@94.373,62.611 C14.2@94.373,61.632 ; 94.712,61.909 ccw(c95.409,61.211) 94.423,61.211 cw(c95.56,61.211) 94.756,62.015 ; 94.9,63.292 cw(c96.941,62.745) v3@95.885,64.574 ; 95.065,63.905 cw(c95.932,63.673) v3@95.863,64.568 ; 95.326,62.319 cw(c96.116,62.319) v3@95.875,63.071 ; v3@95.326,63.209 cw(c97.268,63.209) v3@95.895,64.582 ; v3@95.326,64.527 ccw(c97.268,64.527) v3@95.895,63.154 ; 95.326,64.881 cw(c92.242,64.881) C11.2@94.423,62.7 ; v3@95.81,64.62 ccw(c94.153,64.714) 95.326,65.888 ; v3@95.892,64.656 cw(c96.95,65.888) 95.326,65.888 ; 105.588,76.124 105.588,79.121 106.782,80.315 ; 105.654,79.187 ccw(c104.222,80.62) v1@106.247,80.62 ; v1@106.161,80.586 ccw(c106.782,81.162) 106.782,80.315 ; v1@106.162,80.584 ccw(c106.813,81.235) 106.813,80.315 ; 106.268,79.801 cw(c107.723,78.345) 107.723,80.404 ccw(c107.306,79.79) 106.782,80.315 ; 109.267,80.315 ccw(c109.267,81.842) v1@110.347,80.762 ; v1@110.185,71.552 v1@109.601,70.968 ; v1@110.276,71.471 cw(c109.271,72.223) 109.271,70.968 v1@109.601,70.968 ; v1@110.276,80.762 ccw(c111.356,81.842) 111.356,80.315 ; v1@110.284,71.488 cw(c109.601,71.676) v1@109.601,70.968 ; v1@110.44,67.869 ccw(c111.362,67.869) 110.71,67.217 ; v1@110.465,66.472 ccw(c111.203,66.472) 110.681,65.95 ; v1@110.479,65.109 cw(c112.116,63.554) v1@112.116,65.811 ; v1@110.48,65.039 ccw(c110.947,65.506) 110.947,64.846 ; v1@110.48,66.436 ccw(c111.989,67.945) v1@111.989,65.811 ; v1@110.502,66.52 cw(c110.836,65.294) 111.735,66.192 ; v1@110.553,65.042 ccw(c109.97,65.559) 110.521,66.11 110.896,65.735 110.973,65.811 v1@112.116,65.811 ; v1@110.555,66.441 ccw(c109.955,66.902) v1@110.49,67.437 ; 110.867,80.315 ccw(c110.867,81.842) v1@111.947,80.762 ; v1@110.96,82.245 111.239,82.525 111.252,82.537 ; v1@111.491,68.666 cw(c110.901,68.077) 111.735,68.077 ; v1@111.505,68.626 cw(c110.668,68.71) v1@110.668,67.869 ; 111.633,67.869 v1@110.668,67.869 ; 111.735,65.859 cw(c112.765,65.859) v1@112.403,66.823 ; 111.735,66.519 ccw(c113.001,66.519) v1@112.106,65.624 ; 111.735,66.588 cw(c113.955,66.588) v1@112.385,68.158 ; v1@111.735,68.312 ccw(c113.955,68.312) v1@112.385,66.741 ; v1@111.735,68.758 111.735,66.531 ; v1@111.876,80.762 ccw(c112.956,81.842) 112.956,80.315 ; v1@112.124,65.612 cw(c112.325,66.167) 111.735,66.167 111.735,66.192 ; v1@112.166,65.761 v1@112.116,65.811 ; v1@112.176,65.624 ccw(c111.587,66.213) 112.42,66.213 ; v1@112.344,66.531 111.735,66.531 ; v1@112.42,72.212 v1(112.42,70.841) v1@112.42,69.621 ; 112.467,80.315 ccw(c112.467,81.842) v1@113.547,80.762 ; v1@113.476,80.762 ccw(c114.556,81.842) 114.556,80.315 ; 114.067,80.315 ccw(c114.067,81.842) v1@115.147,80.762 ; 114.084,82.537 114.325,82.779 116.789,85.242 117.17,84.861 117.17,84.684 ; v1@114.325,82.042 cw(c116.103,82.042) 114.846,83.299 ; v1@115.076,80.762 ccw(c116.156,81.842) 116.156,80.315 ; 115.667,80.315 ccw(c115.667,81.842) v1@116.747,80.762 ; 116.027,82.525 116.04,82.537 116.218,82.715 v1(116.815,83.312) ; v1@116.676,80.762 ccw(c117.756,81.842) 117.756,80.315 ; v1@116.766,83.301 cw(c118.231,83.623) 117.17,84.684 ; v1@116.779,83.277 ccw(c117.859,84.356) 117.859,82.829 ; v1@116.818,83.362 ccw(c116.684,81.36) 115.265,82.779 117.17,84.684 ; v1@116.844,83.352 cw(c116.379,82.713) 117.17,82.713 ; v1@116.85,83.277 ccw(c116.077,84.05) 117.17,84.05 ; v7(117,91.345) 117,85.692 120.167,82.525 124.003,82.525 124.231,82.525 ; 117.17,82.964 ccw(c118.524,82.964) v1@117.567,82.007 ; v1@117.555,82.059 cw(c118.643,81.675) 118.643,82.829 ; v1@117.571,82.003 cw(c118.223,82.829) 117.17,82.829 ; v1(117.602,82.042) 118.059,82.499 ; 118.618,80.315 ccw(c118.618,81.903) BT.2@119.741,80.78 ; 118.681,82.537 119.875,82.537 ; BT.2@121.218,80.315 106.782,80.315 ; 122.504,80.315 123.698,79.121 123.952,79.121 ; 124.206,82.144 126.608,84.546 C0.2@126.913,84.546 ; 125.848,83.786 ccw(c125.088,84.546) C0.2@126.163,84.546 ; 85.95,48.184 85.811,48.045 85.811,44.45 v3@86.04,44.45 ; 85.95,48.184 C1_2.1@85.95,49.11 ; 85.95,48.184 85.95,47.359 C1.1@86.04,47.269 ; C1_2.1@85.95,49.11 86.8,48.26 ; C1_2.1@85.95,49.11 C1_2.1@85.95,49.643 ; C1_2.1@85.95,49.643 86.8,48.793 ; v3@86.04,44.45 C1.1@86.04,47.269 ; v3@86.04,44.45 v3@86.131,44.45 ; v3@86.04,44.45 86.04,44.313 v3(86.157,44.45) ; C1.1@86.04,47.269 86.538,47.269 86.8,47.007 C1.1@86.8,47.235 86.8,48.26 ; v3@86.131,44.45 v3(86.157,44.45) ; v3@86.131,44.45 86.131,44.313 v3@86.157,44.313 ; v3@86.157,44.313 v3@86.294,44.313 ; v3@86.157,44.313 86.157,44.121 86.462,43.816 ; v3@86.157,44.313 v3(86.157,44.45) ; v3(86.157,44.45) 85.674,44.313 85.674,42.164 86.309,41.529 86.309,40.03 v3@86.944,39.446 ; v3(86.157,44.45) v3@86.294,44.313 ; 86.276,36.762 86.652,36.386 ; 86.276,36.762 C12.2@86.276,41.437 ; C12.2@86.276,41.437 86.233,41.48 86.233,43.588 86.462,43.816 ; v3@86.294,44.313 86.944,43.663 v3@86.944,39.446 ; v3@86.294,44.313 v3@87.237,44.313 ; 86.652,36.386 v3@88.875,38.608 ; 86.652,36.386 86.843,36.195 89.281,36.195 89.281,37.77 89.281,38.608 ; 86.8,48.26 86.8,48.793 ; 86.8,48.793 87.494,48.099 ; 86.944,38.799 v3@86.944,39.446 ; 86.944,38.799 87.136,38.608 ; 87.02,44.729 C1.1@87.02,47.625 ; 87.02,44.729 87.237,44.946 ; C1.1@87.02,47.625 87.494,48.099 ; 87.136,38.608 87.681,38.608 v3(88.55,38.608) ; 87.237,42.635 88.536,43.933 v3@88.536,48.624 ; 87.237,42.635 v3@87.237,44.313 ; v3@87.237,44.313 87.237,44.946 ; v3@87.237,44.313 87.493,44.313 v3@87.503,44.323 ; 87.237,44.946 87.503,45.212 ; v3@87.259,37.881 cw(c88.019,38.641) 86.944,38.641 ccw(c88.019,38.641) v3@87.259,37.881 ; 87.427,62.078 88.646,63.297 88.646,65.405 pad.0@87.6,65.432 ; 87.494,48.099 cw(c87.047,47.652) 87.568,47.292 ccw(c87.047,47.652) 87.494,48.099 ; 87.494,48.099 87.503,48.108 ; 87.494,48.099 87.503,48.09 ; v3@87.503,44.323 87.68,44.5 v3@87.68,45.364 ; v3@87.503,44.323 87.503,45.212 ; 87.503,45.212 87.503,48.09 ; C1.1@87.503,47.831 ccw(c88.246,47.831) C1.1@87.721,47.306 ; C1.1@87.503,47.831 ccw(c88.246,47.831) C1.1@87.721,47.306 ; C1.1@87.503,47.831 ccw(c88.246,47.831) C1.1@87.721,47.306 ; C1.1@87.503,47.831 ccw(c88.246,47.831) C1.1@87.721,47.306 ; C1.1@87.503,47.831 ccw(c88.246,47.831) C1.1@87.721,47.306 ; 87.503,48.09 87.503,48.108 ; 87.503,48.108 v3@88.036,48.641 ; pad.0@87.6,65.432 87.617,65.431 87.845,65.427 pad.0@87.72,65.302 ; pad.0@87.6,65.432 pad.0@87.96,65.062 ; pad.0@87.6,65.432 pad.0@87.617,65.199 ; pad.0@87.617,65.199 pad.0@87.72,65.302 ; pad.0@87.72,65.302 pad.0@87.96,65.062 ; v3@88.036,48.641 88.036,49.124 ; 88.036,49.124 v3@88.536,48.624 ; v3@88.12,48.515 ccw(c88.223,47.803) 87.503,47.803 cw(c88.223,47.803) v3@88.12,48.515 ; v3@88.12,48.515 ccw(c88.235,47.792) 87.503,47.792 cw(c88.235,47.792) v3@88.12,48.515 ; pad.0@88.519,64.95 cw(c88.519,66.029) 87.756,65.266 ccw(c88.519,66.029) pad.0@88.519,64.95 ; v3(88.55,38.608) v3@88.875,38.608 ; v3(88.55,40.056) 89.738,40.056 89.738,39.472 88.91,38.643 v3@88.875,38.608 ; v3@88.875,38.608 89.281,38.608 ; C14.2@94.373,61.57 ccw(c93.78,62.162) C11.2@94.423,62.7 ; C14.2@94.373,61.57 95.326,62.523 95.326,62.586 ; C14.2@94.373,61.57 C14.2@94.373,61.632 ; C14.2@94.373,61.632 ccw(c93.811,62.194) C11.2@94.423,62.7 ; C14.2@94.373,61.632 95.326,62.586 ; C11.2@94.423,62.7 ccw(c94.759,64.219) v3(95.86,63.119) ; 95.326,62.586 95.326,65.888 ; 95.326,62.586 v3(95.86,63.119) ; 95.326,65.888 95.86,65.354 v3(95.86,64.618) v3(95.86,63.119) ; 105.308,79.198 ccw(c105.308,80.058) 105.917,79.45 ; 105.308,79.198 ccw(c105.308,80.058) 105.917,79.45 ; 105.308,79.198 ccw(c105.308,80.058) 105.917,79.45 ; 105.321,79.2 ccw(c105.061,80.171) 105.932,79.668 ; 105.321,79.2 ccw(c105.061,80.171) 105.932,79.668 ; 105.321,79.2 ccw(c105.061,80.171) 105.932,79.668 ; 105.321,79.2 ccw(c105.061,80.171) 105.932,79.668 ; 105.321,79.2 ccw(c105.061,80.171) 105.932,79.668 ; 105.321,79.2 ccw(c105.061,80.171) 105.932,79.668 ; 105.344,79.283 cw(c104.755,78.694) 105.588,78.694 ; 105.344,79.283 cw(c104.755,78.694) 105.588,78.694 ; 105.344,79.283 cw(c104.755,78.694) 105.588,78.694 ; v1@110.49,66.531 111.396,66.531 ; v1@110.49,66.531 v1@110.49,67.437 ; v1@110.49,66.531 110.49,64.999 110.642,64.846 111.455,64.846 v1@112.42,65.811 ; v1@110.49,67.437 111.396,66.531 ; v1@110.49,67.437 v1(110.49,67.869) v1@110.668,67.869 ; v1@110.668,67.869 v1@112.42,69.621 ; 111.396,66.531 111.735,66.531 ; 111.396,66.531 111.735,66.192 ; 111.735,66.192 ccw(c112.362,66.192) 112.122,65.613 cw(c112.362,66.192) 111.735,66.192 ; 111.735,66.192 v1@112.116,65.811 ; 111.735,66.192 111.735,66.531 ; 111.948,66.531 ccw(c111.948,67.249) v1@112.456,66.741 ; 111.948,66.531 ccw(c111.948,67.249) v1@112.456,66.741 ; 111.948,66.531 ccw(c111.948,67.249) v1@112.456,66.741 ; v1@112.116,65.811 v1@112.42,65.811 ; v1@112.42,65.811 v1(112.42,66.777) v1(112.42,68.123) v1(112.42,69.545) v1@112.42,69.621 ; v1@115.925,82.042 cw(c116.844,82.042) 116.194,82.692 ; v1@115.925,82.042 cw(c116.844,82.042) 116.194,82.692 ; v1@115.925,82.042 cw(c116.844,82.042) 116.194,82.692 ; 117.17,82.829 117.17,83.795 ; 117.17,82.829 118.643,82.829 ; 117.17,83.795 cw(c116.586,83.795) 116.836,83.267 ccw(c116.586,83.795) 117.17,83.795 ; 117.17,83.795 117.78,84.404 117.78,83.337 118.529,83.337 118.643,83.223 118.643,82.829 ; 117.17,83.795 117.17,84.684 ; v3@87.438,49.685 cw(c87.207,48.889) 88.036,48.889 ccw(c87.207,48.889) v3@87.438,49.685 ; 87.503,44.973 cw(c88.247,44.973) 88.073,45.697 ccw(c88.247,44.973) 87.503,44.973 ; pad.0@88.131,65.421 cw(c88.117,64.714) 88.627,65.204 ccw(c88.117,64.714) pad.0@88.131,65.421 ; 95.326,62.365 cw(c96.056,62.365) 95.872,63.071 ccw(c96.056,62.365) 95.326,62.365 ; 111.735,65.876 cw(c112.741,65.876) 112.404,66.824 ccw(c112.741,65.876) 111.735,65.876 ; 111.735,66.048 cw(c112.52,66.048) 112.414,66.826 ccw(c112.52,66.048) 111.735,66.048 ; 111.928,67.869 ccw(c111.928,68.615) 112.456,68.087 cw(c111.928,68.615) 111.928,67.869
  Top Layer w1.2: 123.698,80.493 123.698,81.432
  Top Layer w1.5: v1@104.708,80.044 cw(c103.687,79.023) 105.131,79.023 ; 105.156,71.704 105.893,70.968 v1@109.271,70.968 ; v1@105.156,71.933 105.131,71.958 105.131,73.483 105.131,73.575 105.131,79.959 ; v1@105.887,81.987 cw(c103.289,81.801) 105.131,79.959 ; 106.782,81.61 105.131,79.959 ; C7.1@107.793,80.644 ccw(c107.041,78.049) 105.131,79.959 ; v1@117.365,81.858 ccw(c118.285,82.571) 118.285,81.407 118.407,81.407 ; v1@117.389,81.831 ccw(c118.407,82.842) 118.407,81.407 ; 118.75,81.153 118.407,81.407
  Bottom Layer w0.254: v2@85.725,74.168 v2(85.725,74.219) 86.97,74.219 88.367,75.616 89.611,75.616 90.617,74.61 97.98,74.61 97.98,73.749 ; v2@85.876,74.068 cw(c86.239,73.705) 86.239,74.219 cw(c86.239,74.733) v2@85.876,74.369
  Bottom Layer w0.3: 94.564,31.773 95.329,32.537
  Bottom Layer w0.4: SPI2.8@106.375,100.223 106.375,102.273 ; 106.375,101.327 ccw(c107.31,101.327) SPI2.8@106.649,100.666
  Bottom Layer w0.6: 94.615,41.395 94.615,46.304 ; v2(114.275,100) 114.275,103.073 v2(114.808,103.607)
  Bottom Layer w0.7: v2(84.43,65.354) 85.629,65.354 86.134,65.354 ; 85.496,97.512 ccw(c86.996,97.512) v14@85.936,96.451 ; v2(85.522,98.552) 85.52,98.554 85.496,98.53 85.496,96.714 v14(85.847,96.363) ; 85.99,65.354 cw(c85.99,64.4) v6(86.665,65.075) ; 86.134,65.354 cw(c86.134,64.71) v6(86.665,65.075) ; 86.134,65.354 cw(c86.134,64.71) v6(86.665,65.075) ; 86.134,65.354 87.175,65.354 ccw(c87.175,64.749) v6(86.665,65.075)
  Bottom Layer w0.8: v3@86.614,63.833 v3@86.711,63.833 ; v3@86.949,63.648 cw(c87.394,63.202) 87.394,63.833 ; pad.0@87.398,65.634 pad.0@87.6,65.432 ; pad.0@87.602,65.43 ccw(c88.519,66.348) pad.0@88.519,65.05 ; 87.617,63.817 87.602,63.833 v3@86.711,63.833 ; 87.875,63.386 ccw(c88.767,64.064) 88.767,62.944 ; v3@88.242,63.786 ccw(c86.045,63.877) pad.0@87.6,65.432 ; pad.0@88.469,65.1 ccw(c89.766,65.1) 88.849,64.183 ; v3@88.511,63.87 ccw(c90.38,65.29) 90.38,62.944 87.6,62.944 v3@86.711,63.833 ; pad.0@88.6,65.415 ccw(c90.746,65.324) 89.227,63.805 ; 88.889,64.143 cw(c88.521,63.774) 89.041,63.752 ; 89.484,63.5 89.84,63.144 ; v16(91.796,102.413) 92.227,102.845 96.33,102.845 ; v16@91.866,102.342 cw(c93.079,101.129) 93.079,102.845 ; v1(92.558,96.596) 94.336,98.374 v4(95.352,98.374) 96.33,99.353 pad.0@96.33,100.032 96.33,102.845 ; 95.152,63.805 89.227,63.805 ; 95.555,63.805 96.418,63.805 ; 95.656,66.345 95.656,66.712 ; pad.0@96.143,99.166 ccw(c95.752,99.557) pad.0@96.305,99.557 ; SPI2.8@106.38,100.307 cw(c107.202,99.743) v1@107.431,100.713 ; SPI2.8@106.472,100.524 ccw(c105.603,101.394) 106.832,101.394 ; SPI2.8@106.473,100.526 ccw(c105.772,101.321) 106.832,101.321 ; SPI2.8@106.515,100.504 cw(c107.442,100.386) 107.442,101.321 106.832,101.321 ; v1@107.392,100.762 ccw(c106.832,100.761) 106.832,101.321 ; v1@107.417,99.593 v1@107.417,100.533 ; v1@107.425,70.931 cw(c107.896,70.431) 108.382,70.917 108.179,71.12 v1@108.153,71.145 ; v1@107.442,101.092 108.623,102.273 106.375,102.273 ; v1@107.464,100.807 cw(c107.954,101.816) 106.832,101.816 ; v1@107.492,100.762 cw(c108.41,100.762) 107.761,101.411 ; 108.648,102.273 112.56,102.273 114.808,104.521 ; 113.349,103.062 cw(c114.808,101.604) v2@114.808,103.667 ; v2@114.762,103.568 cw(c115.31,104.019) 114.808,104.521 ; v2(114.808,103.607) 114.808,104.521 ; 117.501,108.319 117.501,106.35 117.475,106.324 ; v1(120.015,106.324) 117.475,106.324 ; pad.0@87.6,65.432 89.227,63.805 ; 96.33,102.845 105.804,102.845 106.375,102.273 ; 106.375,102.273 106.832,101.816 ; 106.832,101.321 106.832,101.816 ; 114.808,104.521 116.611,106.324 117.475,106.324
  Bottom Layer w0.9: v3@83.642,43.06 83.976,42.726 84.099,42.603 84.404,42.298 ; v3@83.845,42.496 cw(c83.845,41.625) 84.461,42.241 ; 86.652,36.386 87.046,36.779 87.046,39.656 85.656,41.046 85.271,41.431 85.014,41.688 84.712,41.99 84.7,42.002 84.404,42.298 ; 86.907,39.796 cw(c86.43,39.319) v3@87.104,39.319 ; 87.046,37.043 ccw(c87.894,37.043) v3@87.294,36.444 ; 87.046,37.175 cw(c87.894,37.175) v3@87.294,37.775 ; 87.046,38.517 ccw(c87.894,38.517) v3@87.294,37.917 ; 87.046,38.696 cw(c87.827,38.696) v3@87.275,39.248 ; 93.484,40.322 93.841,40.322 ; 93.841,39.599 93.841,37.009 94.742,36.108 ; 84.404,42.298 ccw(c83.918,41.812) 83.855,42.496 cw(c83.918,41.812) 84.404,42.298